# EAGLE board esplash (EAGLE 9.2.2)
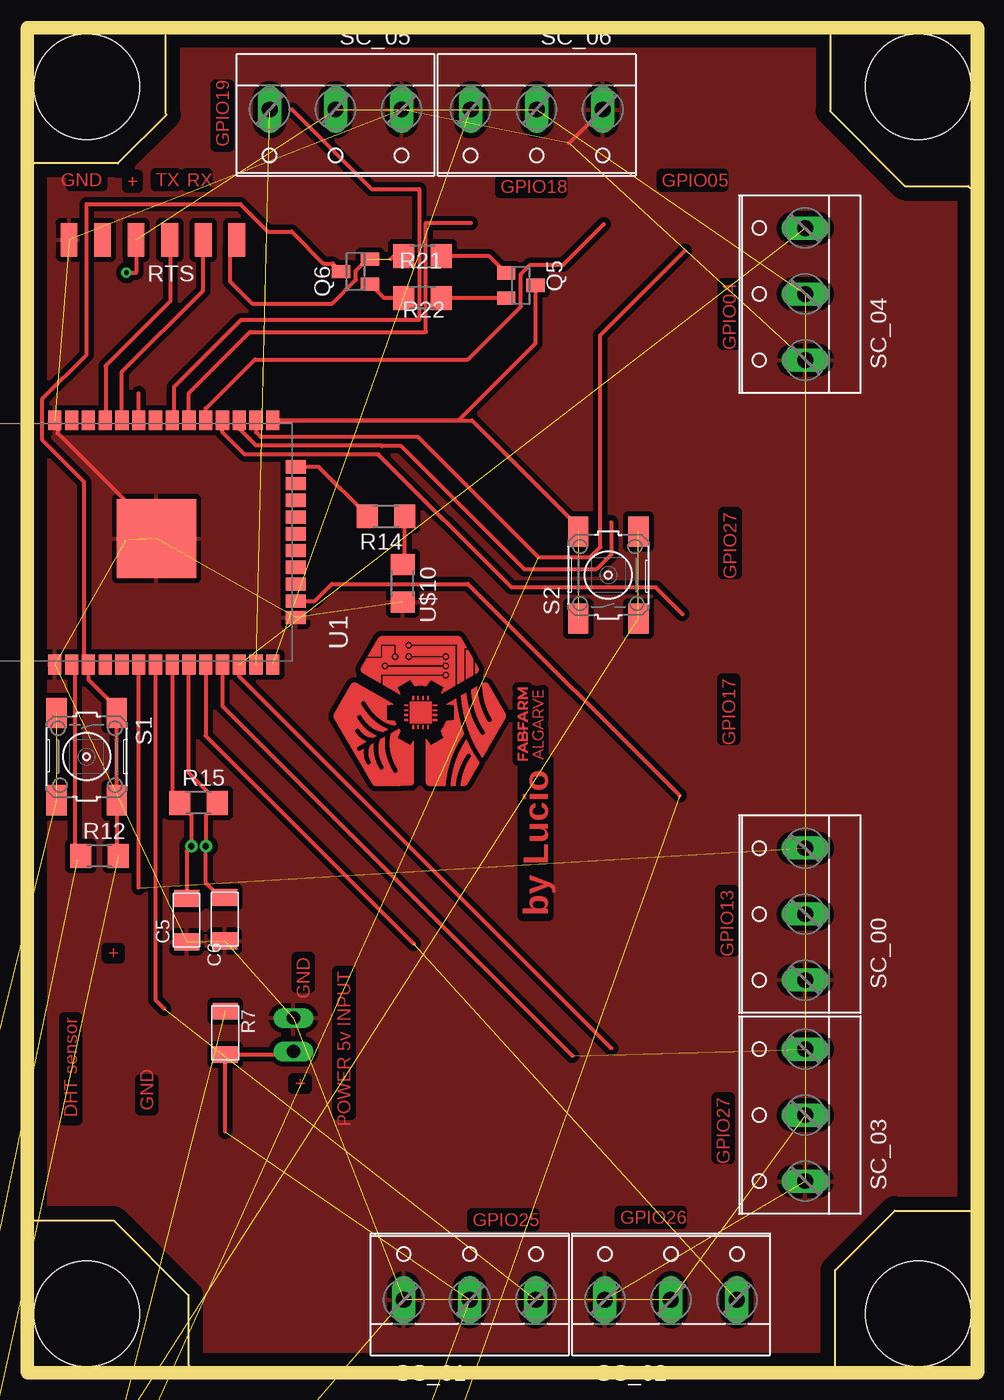
[diagram p0: board, top side]
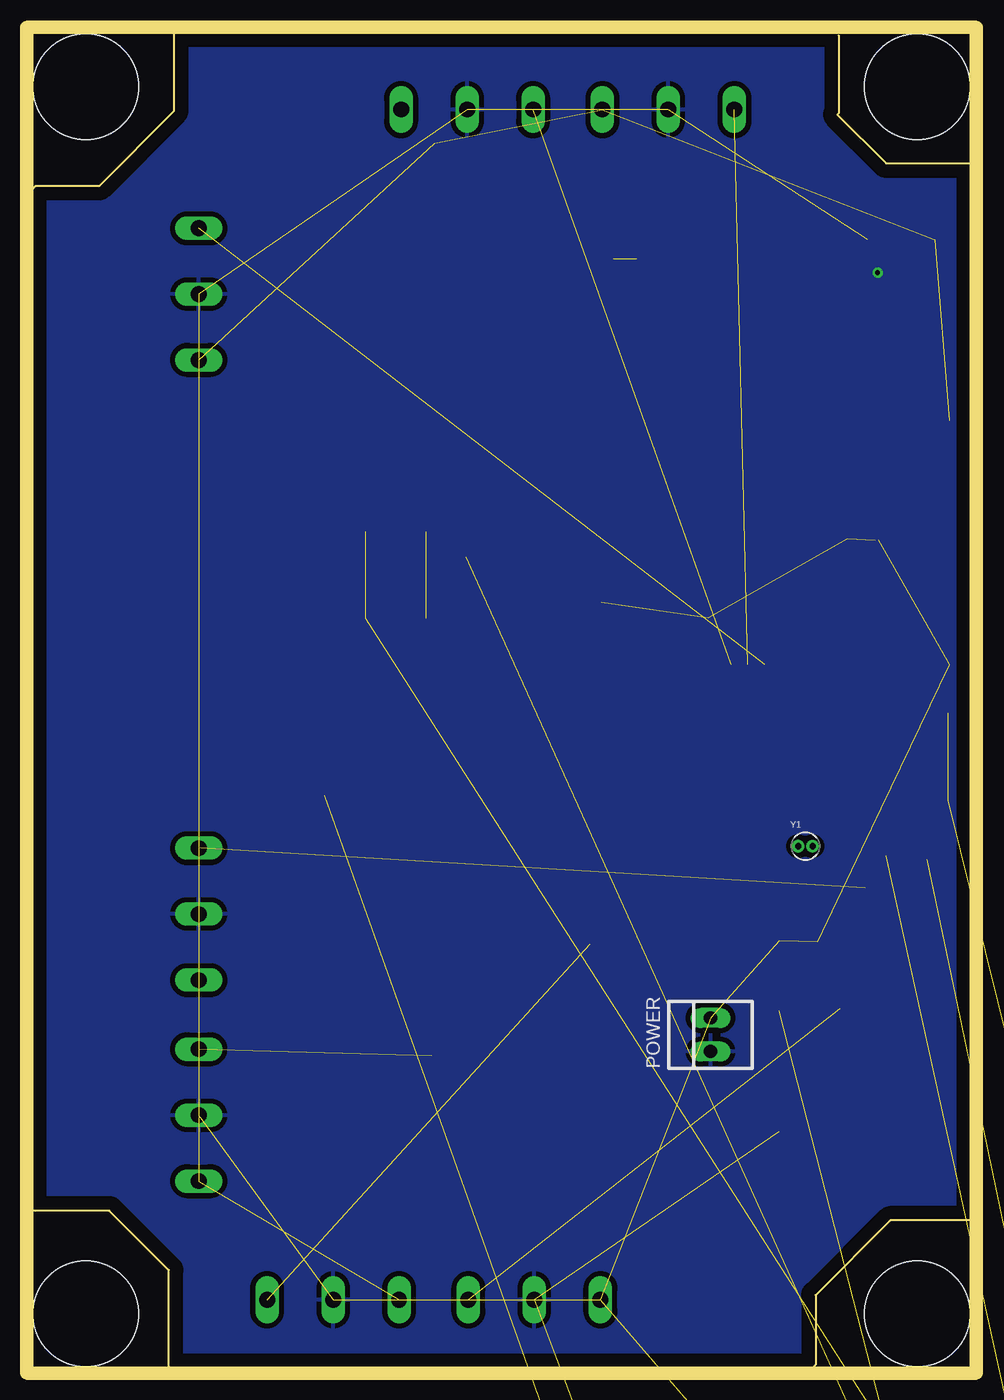
[diagram p1: board, bottom side, seen from below]

Size 71.07 x 101.07 mm. Coordinates in mm from the lower left corner, seen from the top.
Outline: 0.07,91.2 0.07,0 11.9,0
Outline: 0.07,91.2 0.07,101 71.07,101 71.07,0 60.77,0
Outline: 60.77,0 11.9,0
Outline: 60.77,0 60.77,7.3 65.29,11.81 71.07,11.81
Outline: 0,11.07 6.11,11.07 11.77,5.42 11.77,0.14 11.9,0
Outline: 10.04,100.9 10.04,94.98 10.12,94.89 6.43,91.2 0.07,91.2
Outline: 60.39,101.07 60.39,95.15 66.06,89.48 70.87,89.48 71.05,89.31
Copper layers (1*16): Top 0.035mm / dielectric 1.5mm / Bottom 0.035mm
Design rules "default *": minimum track width 12mil, minimum drill 0.35mm, track to track 0.4mm, track to pad 0.4mm, pad to pad 0.4mm, via to via 0.4mm, smd to smd 0.4mm, copper to edge 40mil, drill to drill 6mil, minimum pad ring 10mil, minimum via ring 8mil, stop-mask expansion 4mil, vias tented up to drill 0mil, thermal gap 15mil
Holes 8 mm at 4.07,4 4.07,97 67.07,97 67.07,4
Milling: 4 lines

## Footprints (pad centres in the part's own frame; a part is rotated, then mirrored left to right if it is on the bottom)
C1206FAB = smd 1.27 x 1.905: 1 -1.651,0; 2 1.651,0
22-23-2021 = drill 1 long: 1 -1.27,0; 2 1.27,0
SOT23 = smd 1 x 1.4: 1 -0.95,-1.1; 2 0.95,-1.1; 3 0,1.1
R1206FAB = smd 1.27 x 1.905: 1 -1.651,0; 2 1.651,0
R1206 = smd 1.6 x 1.803: 1 -1.422,0; 2 1.422,0
1X06SMD = smd 2.54 x 1.27: 1 0,6.35; 2 0,3.81; 3 0,1.27; 4 0,-1.27; 5 0,-3.81; 6 0,-6.35
6MM_SWITCH = smd 2.286 x 1.524: 1 -3.302,2.286; 2 3.302,2.286; 3 -3.302,-2.286; 4 3.302,-2.286
W237-103 = drill 1.194 long: 1 -5,-1.29; 2 0,-1.29; 3 5,-1.29
ESP-WROOM-32 = smd 1.5 x 1: 1 -9.25,7; 2 -9.25,5.73; 3 -9.25,4.46; 4 -9.25,3.19; 5 -9.25,1.92; 6 -9.25,0.65; 7 -9.25,-0.62; 8 -9.25,-1.89; 9 -9.25,-3.16; 10 -9.25,-4.43; 11 -9.25,-5.7; 12 -9.25,-6.97; 13 -9.25,-8.24; 14 -9.25,-9.51; 25 9.25,-9.51; 26 9.25,-8.24; 27 9.25,-6.97; 28 9.25,-5.7; 29 9.25,-4.43; 30 9.25,-3.16; 31 9.25,-1.89; 32 9.25,-0.62; 33 9.25,0.65; 34 9.25,1.92; 35 9.25,3.19; 36 9.25,4.46; 37 9.25,5.73; 38 9.25,7 | smd 1 x 1.5: 15 -5.7,-11.25; 16 -4.43,-11.25; 17 -3.16,-11.25; 18 -1.89,-11.25; 19 -0.62,-11.25; 20 0.65,-11.25; 21 1.92,-11.25; 22 3.19,-11.25; 23 4.46,-11.25; 24 5.73,-11.25 | smd 6 x 6: GND 0.3,-0.7
LED1206 = smd 1.6 x 1.803: 1 -1.422,0; 2 1.422,0
XTAL_ECS-.327-12.5-13X = drill 0.46 pad 0.86: 1 -0.55,0; 2 0.55,0

## Placement (x,y rotation side)
C1  10uF  [C1206FAB]  -21.82,-73.87 0 top  (outside the outline)
C2  100nF  [C1206FAB]  -21.82,-79.4 0 top  (outside the outline)
C3  1uF  [C1206FAB]  -21.82,-102.74 0 top  (outside the outline)
C4  1uF  [C1206FAB]  -21.82,-97.22 0 top  (outside the outline)
C5  15pf  [C1206FAB]  11.64,33.83 90 top
C6  15pf  [C1206FAB]  14.52,33.91 90 top
POWER  22-23-2021  [22-23-2021]  19.73,25.15 90 bottom
Q5  BCX70SMD  [SOT23]  36.96,81.94 270 top
Q6  BCX70SMD  [SOT23]  24.44,82.99 90 top
R1  10Kohm  [R1206FAB]  -21.82,-68.34 0 top  (outside the outline)
R2  100ohm  [R1206]  -21.71,-85.29 0 top  (outside the outline)
R3  50 ohm  [R1206]  -21.56,-50.89 0 top  (outside the outline)
R4  100Kohm  [R1206FAB]  -21.82,-108.27 0 top  (outside the outline)
R5  4.9Kohm  [R1206FAB]  -21.82,-136.61 0 top  (outside the outline)
R6  10Kohm  [R1206FAB]  -21.82,-142.14 0 top  (outside the outline)
R7  49.9Kohm  [R1206FAB]  14.55,25.29 270 top
R8  10Kohm  [R1206FAB]  -21.82,-147.67 0 top  (outside the outline)
R9  50Kohm  [R1206FAB]  -21.82,-113.8 0 top  (outside the outline)
R10  5Kohm  [R1206FAB]  -21.82,-119.32 0 top  (outside the outline)
R12  10k  [R1206]  5.04,38.7 0 top
R14  100ohm  [R1206]  26.74,64.44 180 top
R15  5M  [R1206]  12.55,42.72 0 top
R20  50 ohm  [R1206]  -21.56,-57.03 0 top  (outside the outline)
R21  10k  [R1206]  29.5,84.16 180 top
R22  10k  [R1206]  29.51,80.98 0 top
RTS  FTDI-SMD-HEADER  [1X06SMD]  9.08,85.4 90 top
S1  Reset  [6MM_SWITCH]  4.06,46.22 270 top
S2  GPIO0 Button  [6MM_SWITCH]  43.59,59.99 90 top
SC_00  SC  [W237-103]  57.22,34.29 90 top
SC_01  SC  [W237-103]  33.09,6.35 0 top
SC_02  SC  [W237-103]  48.33,6.35 0 top
SC_03  SC  [W237-103]  57.22,19.05 90 top
SC_04  SC  [W237-103]  57.22,81.28 90 top
SC_05  SC  [W237-103]  22.93,93.98 180 top
SC_06  SC  [W237-103]  38.17,93.98 180 top
SC_07  SC  [W237-103]  -16.64,-125.91 0 top  (outside the outline)
U1  ESP-WROOM-32  [ESP-WROOM-32]  8.66,62.46 90 top
U$1  LED  [LED1206]  -21.71,-91.44 0 top  (outside the outline)
U$10  LED  [LED1206]  28.01,59.36 270 top
Y1  ECS-.327-12.5-13X  [XTAL_ECS-.327-12.5-13X]  12.55,39.44 0 bottom

## Library data of the parts
C1-C6 R1-R10 R12 R14 R15 R20-R22 RTS S1 S2 U$1 U$10 = fab
POWER = con-molex; MF: MOLEX; MPN: 22-23-2021; OC_FARNELL: 1462926; OC_NEWARK: 25C3832
Q5 Q6 = transistor
SC_00 SC_01-SC_07 = con-wago-500; MPN: 237-103; OC_FARNELL: unknown; OC_NEWARK: 18M7116
U1 = esp32
Y1 = ECS-.327-12.5-13X; AVAILABILITY: Unavailable; DESCRIPTION: 32.768kHz ±20ppm Crystal 12.5pF 35 kOhms Cylindrical Can, Radial; MF: ECS Inc.; MP: ECS-.327-12.5-13X; PACKAGE: Cylindrical Can Radial ECS International; PRICE: None

## Nets
3V3: C1.2 C2.1 C3.1 R2.2 R12.1 U1.2
32K_XN: C6.2 R15.2 U1.9 Y1.1
32K_XP: C5.2 R15.1 U1.8 Y1.2
BUT_CHIP_LO: R20.1 S1.3 S1.4
BUT_IO0_LO: R3.1 S2.3 S2.4
CHIP_PU: C4.1 Q6.3 R12.2 S1.1 S1.2 U1.3
DTR: Q5.2 R22.2
GND: C1.1 C2.2 C3.2 C4.2 C5.1 C6.1 POWER.2 R1.1 R3.2 R20.2 RTS.1 SC_00.1 SC_01.1 SC_02.1 SC_03.1 SC_04.1 SC_05.1 SC_06.1 SC_07.1 U1.1 U1.15 U1.38 U1.GND U$1.2 U$10.2
GPIO0: Q5.3 S2.1 S2.2 U1.25
GPIO1/TXD0: RTS.4 U1.35
GPIO02: R14.2 U1.24
GPIO3/RXD0: RTS.5 U1.34
GPIO4/POWER_VOLT_IN: R1.2 R10.1 U1.26
GPIO05: U1.29
GPIO12/BATT_IN_7: SC_06.3 U1.14
GPIO13/BATT_IN_8: SC_07.3 U1.16
GPIO14/BATT_IN_6: SC_05.3 U1.13
GPIO15: U1.23
GPIO16: U1.27
GPIO17: U1.28
GPIO18: U1.30
GPIO19: U1.31
GPIO21: U1.33
GPIO22: U1.36
GPIO23: U1.37
GPIO25/BATT_IN_3: SC_02.3 U1.10
GPIO26/BATT_IN_4: SC_03.3 U1.11
GPIO27/BATT_IN_5: SC_04.3 U1.12
GPIO34/BATT_IN_1: SC_00.3 U1.6
GPIO35/BATT_IN_2: SC_01.3 U1.7
GPIO36: U1.4
GPIO39: U1.5
N$2: R2.1 U$1.1
N$3: R4.2 R7.1 R9.2
N$5: R4.1 R9.1 R10.2
N$6: R5.1 R6.2
N$7: R6.1 R8.2
N$8: R8.1
N$10: R14.1 U$10.1
N$12: R5.2
N$26: Q5.1 R21.1
N$34: Q6.1 R22.1
RTS: Q6.2 R21.2 RTS.6
VCC: POWER.1 R7.2 RTS.3 SC_00.2 SC_01.2 SC_02.2 SC_03.2 SC_04.2 SC_05.2 SC_06.2 SC_07.2

## Tracks (layer width: path | path; a pad name or v marks a point on that pad's centre or on a via)
3V3  (4 unrouted)
  Top 0.305: 3.36,38.44 R12.1 3.15,39.17 3.15,52.98 U1.2
32K_XN
  Top 0.305: C6.2 14.2,35.56 13.1,36.66 Y1.1 13.1,41.75 13.97,42.62 R15.2 13.97,42.82 11.82,44.98 U1.9
32K_XP
  Top 0.305: U1.8 10.55,43.3 R15.1 11.13,42.62 12,41.75 Y1.2 11.64,39.07 C5.2
BUT_CHIP_LO  (2 unrouted)
BUT_IO0_LO  (2 unrouted)
CHIP_PU  (1 unrouted)
  Top 0.305: R12.2 6.35,38.82 S1.2 S1.1 6.35,49.91 4.2,52.06 U1.3 3.88,53.52 3.88,57.96 3.88,57.97 3.88,67.05 0.72,70.21 0.72,73.36 4.06,76.7 4.06,88.1 15.72,88.1 17.81,86.02 19.59,86.02 22.01,83.6 22.73,83.6 Q6.3
DTR
  Top 0.305: Q5.2 R22.2
GND  (24 unrouted)
  Top 0.305: 40.62,92.72 SC_06.1 | U1.38 1.88,71.49 1.88,70.73 7.25,65.36 7.25,62.63 7.04,62.63
  pour Top: -17.44,-38.93 77.18,-38.93 77.18,149.65 -17.44,149.65
GPIO0  (1 unrouted)
  Top 0.305: S2.2 41.3,63.67 33.26,71.71 U1.25 32.23,71.71 38.06,77.53 Q5.3
GPIO1/TXD0
  Top 0.305: RTS.4 10.42,85.33 10.42,80.76 5.51,75.85 5.51,71.75 U1.35
GPIO02
  Top 0.305: R14.2 25.32,64.54 21.67,68.19 U1.24
GPIO3/RXD0
  Top 0.305: U1.34 6.74,75.39 12.89,81.55 RTS.5
GPIO4/POWER_VOLT_IN  (2 unrouted)
  Top 0.305: U1.26 16.9,70.81 17.24,70.47 29.15,70.47 38.29,61.34 42.23,61.34 42.99,62.1 42.99,78.19 49.37,84.57
GPIO05
  Top 0.305: U1.29 13.09,72.61 16.8,76.33 32.94,76.33 36.96,80.35 36.96,82.8 37.66,83.5 40.19,83.5 43.25,86.57
GPIO12/BATT_IN_7  (1 unrouted)
GPIO13/BATT_IN_8  (1 unrouted)
  Top 0.305: U1.16 21.35,58.03 22.64,59.32 32.96,59.32 49,43.28
GPIO14/BATT_IN_6  (1 unrouted)
GPIO16
  Top 0.305: 43.81,64 43.81,61.55 42.68,60.41 37.25,60.41 27.9,69.75 26.45,69.75 26.38,69.83 16.88,69.83 15.63,71.08 U1.27
GPIO17
  Top 0.305: 49.21,57.03 47.19,59.05 36.26,59.05 26.17,69.13 16.03,69.13 14.36,70.81 U1.28
GPIO18
  Top 0.305: 33.17,86.66 32.62,86.66 29.77,86.66 29.77,78.41 16.43,78.41 11.82,73.79 U1.30
GPIO19
  Top 0.305: 19.64,95.27 25.67,89.25 26.19,89.25 29.26,89.25 29.26,79.32 15.75,79.32 10.67,74.23 10.67,71.71 U1.31
GPIO21
  Top 0.305: U1.33 8.01,73.77
GPIO25/BATT_IN_3  (1 unrouted)
  Top 0.305: U1.10 13.09,47.81 28.85,32.04
GPIO26/BATT_IN_4  (1 unrouted)
  Top 0.305: U1.11 14.36,50.06 40.86,23.56
GPIO27/BATT_IN_5  (1 unrouted)
  Top 0.305: U1.12 15.63,52.31 43.82,24.12
GPIO34/BATT_IN_1  (1 unrouted)
  Top 0.305: 8.01,36.28 U1.6
GPIO35/BATT_IN_2  (1 unrouted)
  Top 0.305: U1.7 9.28,27.79 9.95,27.11
N$2  (1 unrouted)
N$3  (2 unrouted)
N$5  (2 unrouted)
N$6  (1 unrouted)
N$7  (1 unrouted)
N$10
  Top 0.305: U$10.1 28.16,60.59 R14.1
N$26
  Top 0.305: Q5.1 34.59,84.16 R21.1
N$34
  Top 0.305: R22.1 26.6,80.98 Q6.1
RTS  (2 unrouted)
  Top 0.305: R21.2 27.32,84.16 27.1,83.94 | RTS.6 14.91,84.87 14.91,82.26 16.6,80.57 22.66,80.57 24.46,82.37 24.46,83.06 25.34,83.94
VCC  (via drill 0.35)  (9 unrouted)
  Top 0.305: POWER.1 19.5,23.64 R7.2 14.56,17.8 | v7.07,82.91 7.81,82.91 RTS.3
  pour Bottom: -13.13,-30.77 -13.13,146.01 77.18,146.01 77.18,-30.77
(copper drawn outside any net)
  shapes: Top area x14404

## Text on the board
Top: GPIO19 | GND | + | TX | RX | GPIO18 | GPIO05 | GPIO04 | GPIO27 | GPIO17 | GPIO13 | by Lucio | + | GND | POWER 5v INPUT | DHT sensor | + | GPIO27 | GND | GPIO25 | GPIO26